# Altium PCB BRD220522_2022-07-04.pcbdoc
Units mm, origin at the board's own origin, x right, y up, seen from the top; angles counter-clockwise.
Board outline 129.01 x 102.76 mm, 2 copper layers (Top Layer, Bottom Layer); 67 components, 48 nets, 235 pads, 151 vias.
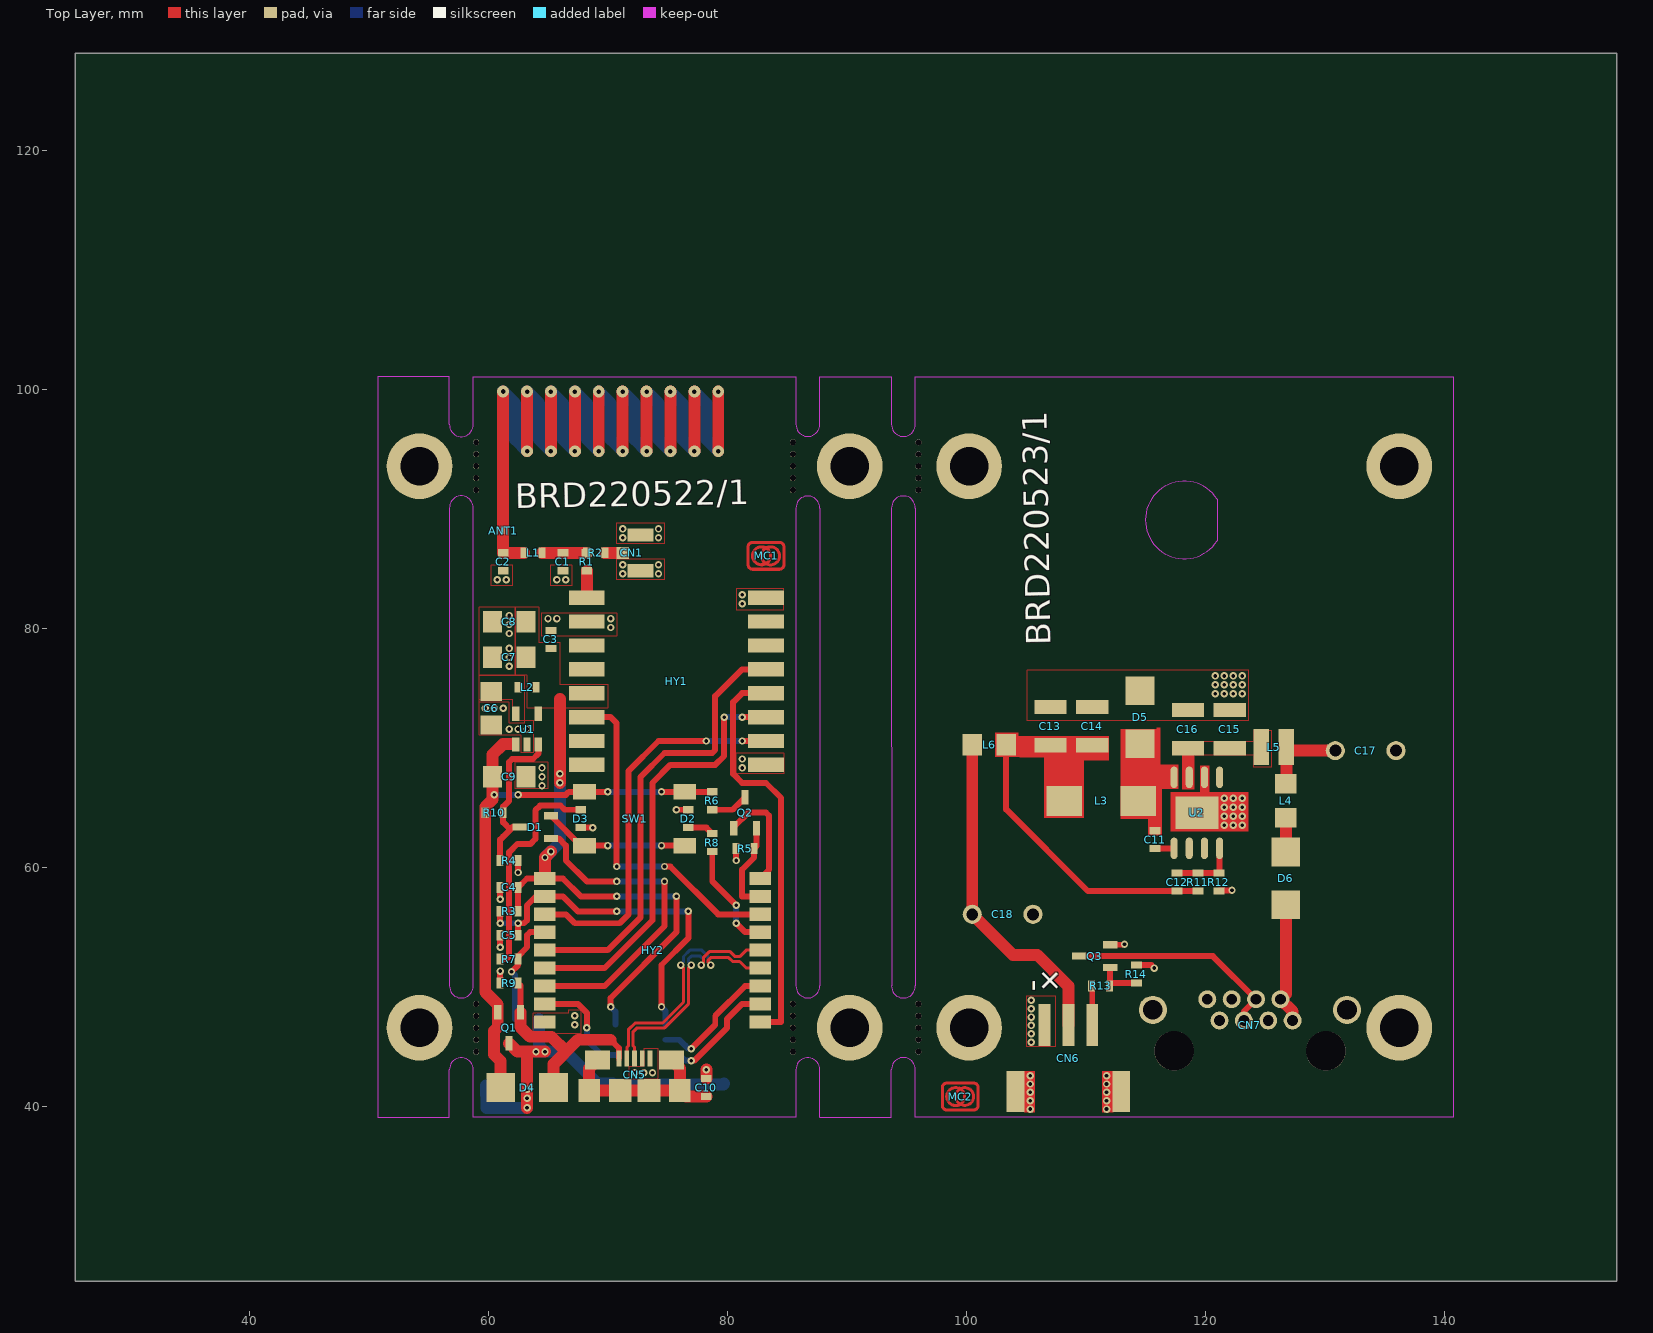
[diagram p0: Top Layer view]
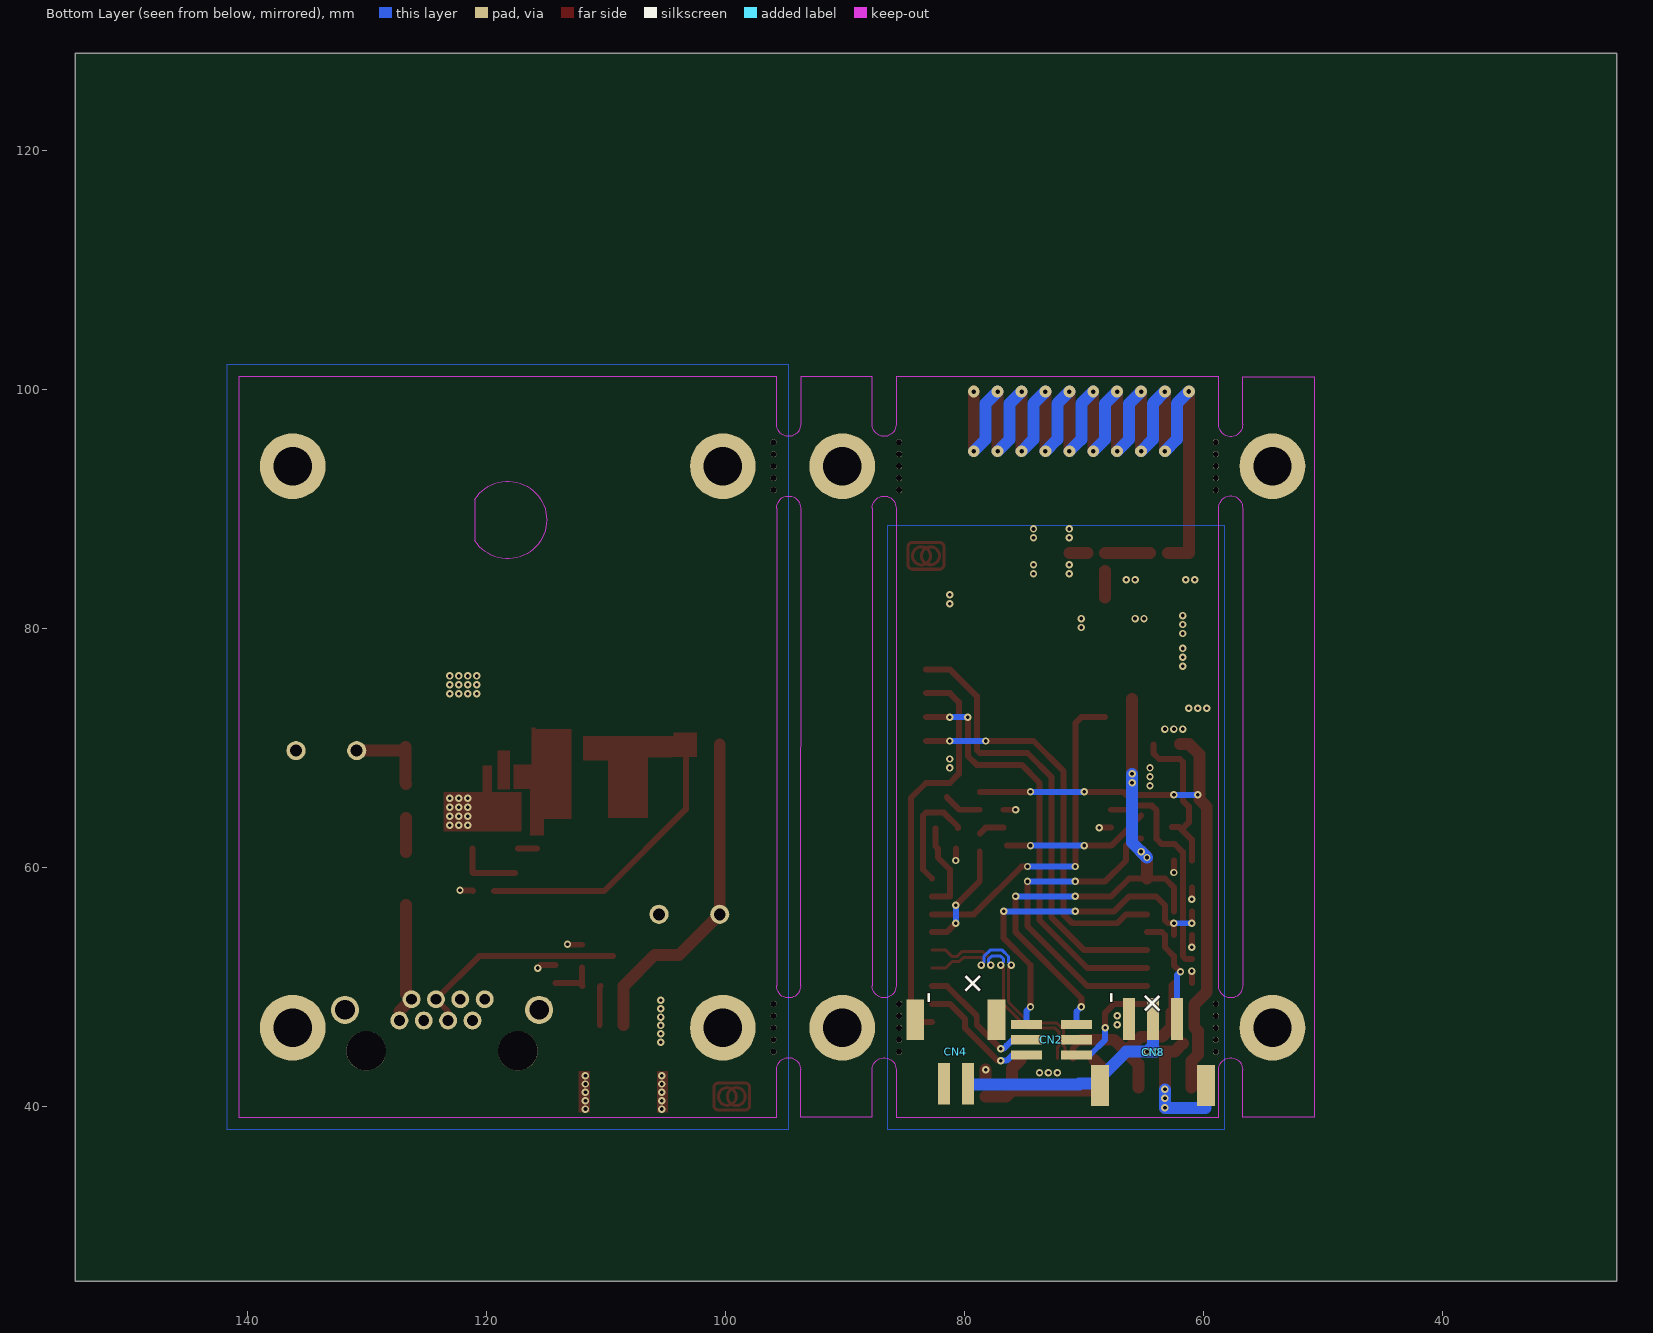
[diagram p1: Bottom Layer view, seen from below]

## Layer stack, top to bottom
Top Layer: signal copper (thickness not stored)
Dielectric: dielectric 0.32, FR-4, Dk 4.8
Bottom Layer: signal copper (thickness not stored)

## Board outline
154.414,25.4 25.4,25.4 25.4,128.164 154.414,128.164

## Components (designator, comment, footprint, x,y, rotation, side; value= is the part's Value field where it differs from the comment)
ANT1 "DN038" ANT_DN038 70.214,94.6 r0 top
C1 "100p" CA_0603 66.214,85.6 r270 top
C2 "100p" CA_0603 61.214,85.6 r270 top
C3 "100n" CA_0603 65.214,79.1 r90 top
C4 "100n" CA_0603 61.714,58.35 r180 top
C5 "100n" CA_0603 61.714,54.35 r180 top
C6 "10U/6V3" CA_1206 60.214,73.35 r270 top
C7 "10U/6V3" CA_1206 61.714,77.6 r180 top
C8 "10U/6V3" CA_1206 61.714,80.6 r180 top
C9 "10U/6V3" CA_1206 61.714,67.6 r0 top
C10 "1n" CA_0603 78.214,41.6 r270 top
C11 "10n" CA_0603 115.769,62.345 r90 top
C12 "82p" CA_0603 117.614,58.8 r90 top
C13 "22uF" CA_1210 107.019,71.845 r90 top
C14 "22uF" CA_1210 110.519,71.845 r90 top
C15 "10U/50V" CA_1210 122.019,71.595 r90 top
C16 "10U/50V" CA_1210 118.519,71.595 r90 top
C17 "100uF" CA_TH_D10_P05_H11 133.394,69.799 r0 top
C18 "100uF" CA_TH_D10_P05_H11 103.014,56.1 r0 top
CN1 "U.FL" CN_ANT-SMD_UFL-R-SMT-1 71.964,86.351 r90 top
CN2 "20021521" CN_HDR_2X3_180D_P127_SMD 72.714,45.6 r0 bottom
CN4 "S2B-PH" CN_HDR_1X2_90D_P20_JST_S2B-PH-SM4-TB 80.714,44.6 r180 bottom
CN5 "10118192-0002LF" CN_USB_MICRO_B_AMPHENOL_10118192-0002LF 72.214,41.35 r0 top
CN6 "S3B-PH" CN_HDR_1X3_90D_P25_JST_PH_S3B#1 108.514,44.1 r0 top
CN7 "X12ADGWA3DY1027" CN_MODJACK_8C8P_RA_NO_LED 123.714,48.1 r0 top
CN8 "S3B-PH" CN_HDR_1X3_90D_P25_JST_PH_S3B#2 64.214,44.6 r0 bottom
D1 "BAT54C" SC_SOT23-3 63.914,63.4 r90 top
D2 "GREEN" DI_LED_GREEN_0603 76.714,64.1 r270 top
D3 "RED" DI_LED_RED_0603 67.714,64.1 r90 top
D4 "MBRS240LT3G" DI_DO214AA_SMB 63.214,41.6 r0 top
D5 "MBRS240" DI_DO214AA_SMB 114.519,72.595 r90 top
D6 "MBRS240" DI_DO214AA_SMB 126.714,59.1 r270 top
HY1 "RFM69HCW-868S2" HY_RFM69HCW 75.714,75.601 r180 top
HY2 "ESP-C3-13U-4M" HY_WIRELM-SMD_ESP-C3-13U-2M 73.714,53.1 r0 top
L1 "L_unknown" CL_0603 63.714,86.35 r180 top
L2 "L_unknown" CL_0603 63.214,75.1 r0 top
L3 "10U" CL_STD6050 111.269,65.596 r180 top
L4 "120E/100MHz" CL_1206 126.714,65.6 r90 top
L5 "1uH" CL_1212 125.714,70.1 r180 top
L6 "120E/100MHz" CL_1206 101.894,70.299 r180 top
MC1 "LIEBTRAU_LOGO" MC_LIEBTRAU_LOGO 83.214,86.1 r180 top
MC2 "LIEBTRAU_LOGO" MC_LIEBTRAU_LOGO 99.464,40.85 r0 top
Q1 "SI3401A" SC_SOT23-3 61.714,46.6 r180 top
Q2 "NXV55UNR" SC_SOT23-3 81.464,64.6 r0 top
Q3 "BC847B" SC_SOT23-3 110.714,52.6 r90 top
R1 "0E" RE_0603 68.214,85.6 r90 top
R2 "0E" RE_0603 68.964,86.35 r0 top
R3 "10K" RE_0603 61.714,56.35 r0 top
R4 "2M2" RE_0603 61.714,60.6 r180 top
R5 "3K3" RE_0603 81.464,61.6 r0 top
R6 "10K" RE_0603 78.714,65.6 r270 top
R7 "10K" RE_0603 61.714,52.35 r0 top
R8 "10K" RE_0603 78.714,62.1 r270 top
R9 "2M2" RE_0603 61.714,50.35 r0 top
R10 "0E" RE_0603 60.464,64.6 r0 top
R11 "68K" RE_0603 119.364,58.8 r270 top
R12 "22K" RE_0603 121.114,58.8 r90 top
R13 "3K3" RE_0603 111.214,50.1 r180 top
R14 "22K" RE_0603 114.214,51.1 r90 top
SW1 "PTS645" SW_MOM_6X6 72.215,64.1 r0 top
U1 "RT9080-33GJ5" SC_SOT23-5 63.214,71.6 r90 top
U2 "RT8279GSP" SC_SO08_150MIL_BODY_PP 119.269,64.596 r90 top
? "" ? 95.714,108.506 r0 top
? "" ? 44.308,70.1 r0 top
? "" ? 72.214,101.049 r0 top
? "" ? 50.597,70.1 r0 top
? "" ? 118.214,101.067 r0 top

## Footprints (in the part's own frame and the unit in brackets; to place one, negate y for a bottom-side part, rotate by r counter-clockwise, add the part's x,y. Pads: shape width x height; smd on the part's side, far side on the other; paste and mask are expansions set on the pad)
ANT_DN038 [mil]
  rect 10x20 smd: 1(-354.42,-252.03)
  Top Layer lines w39.37: -275.58,9.84 -275.57,206.68 ; -196.85,9.84 -196.85,206.64 ; -118.15,9.84 -118.15,206.64 ; -39.36,9.84 -39.36,206.67 ; 39.38,9.83 39.38,206.68 ; 118.12,9.84 118.12,206.68 ; 196.85,9.84 196.86,206.67 ; 275.55,9.84 275.65,206.64 ; 354.33,9.84 354.34,206.68
  Bottom Layer lines w39.37: -354.33,206.69 -314.96,167.32 -314.96,49.21 -275.59,9.84 ; -275.57,206.68 -236.2,167.31 -236.2,49.2 -196.84,9.83 ; -196.84,206.68 -157.47,167.31 -157.47,49.2 -118.1,9.83 ; -118.11,206.68 -78.74,167.31 -78.74,49.2 -39.37,9.83 ; -39.36,206.68 0.01,167.31 0.01,49.2 39.38,9.83 ; 39.38,206.68 78.75,167.31 78.75,49.2 118.12,9.83 ; 118.12,206.68 157.49,167.31 157.49,49.2 196.86,9.83 ; 196.85,206.68 236.23,167.31 236.23,49.2 275.59,9.84 ; 275.6,206.67 314.97,167.3 314.97,49.19 354.34,9.82
CA_0603 [mm]
  rect 0.6x0.9 smd: 1(-0.75,0) 2(0.75,0)
CA_1206 [mil]
  rect 63x70.9 smd: 1(-55,0) 2(55,0)
CA_1210 [mm]
  rect 1.2x2.7 smd: 1(-1.6,0) 2(1.6,0)
CA_TH_D10_P05_H11 [mm]
  round 1.6 hole 1: 1(-2.54,0) 2(2.54,0)
CL_0603 [mm]
  rect 0.6x0.9 smd: 1(-0.75,0) 2(0.75,0)
CL_1206 [mil]
  rect 63x71 smd: 1(-56,0) 2(56,0)
CL_1212 [mm]
  rect 1.3x3 smd: 1(-1.05,0) 2(1.05,0)
CL_STD6050 [mm]
  rect 3x2.5 smd: 1(-3.1,0) 2(3.1,0)
CN_ANT-SMD_UFL-R-SMT-1 [mm]
  rect 1x1.05 smd: 1(0,0.75)
  rect 1.1x2.2 smd: 2(-1.5,-0.75) 2(1.5,-0.75)
CN_HDR_1X2_90D_P20_JST_S2B-PH-SM4-TB [mm]
  rect 1.5x3.4 smd: 0(-3.4,2.675) 0(3.4,2.675)
  rect 1x3.5 smd: 1(1,-2.675) 2(-1,-2.675)
CN_HDR_1X3_90D_P25_JST_PH_S3B#1 [mm]
  rect 1.5x3.4 smd: 0(-4.425,-2.825) 0(4.425,-2.825)
  rect 1x3.5 smd: 1(-2,2.725) 2(0,2.725) 3(2,2.725)
CN_HDR_1X3_90D_P25_JST_PH_S3B#2 [mm]
  rect 1.5x3.4 smd: 0(-4.425,2.825) 0(4.425,2.825)
  rect 1x3.5 smd: 1(2,-2.725) 2(0,-2.725) 3(-2,-2.725)
CN_HDR_2X3_180D_P127_SMD [mm]
  rect 2.6x0.76 smd: 1(2.1,-1.27) 2(-2.1,-1.27) 3(2.1,0) 4(-2.1,0) 5(2.1,1.27) 6(-2.1,1.27)
CN_MODJACK_8C8P_RA_NO_LED [mm]
  round 1.5 hole 0.9: 1(3.57,-0.89) 2(2.55,0.89) 3(1.53,-0.89) 4(0.51,0.89) 5(-0.51,-0.89) 6(-1.53,0.89) 7(-2.55,-0.89) 8(-3.57,0.89)
  round 2.35 hole 1.65: S(-8.125,0) S(8.125,0)
  round 3.3 hole 3.3 unplated: ""(-6.35,-3.43) ""(6.35,-3.43)
CN_USB_MICRO_B_AMPHENOL_10118192-0002LF [mm]
  rect 0.4x1.35 smd: 1(-1.3,2.68) 2(-0.65,2.68) 3(0.002,2.679) 4(0.65,2.68) 5(1.3,2.68)
  rect 1.8x1.9 smd: S(-3.8,0) S(3.8,0)
  rect 2.1x1.6 smd: S(-3.1,2.55) S(3.1,2.55)
  rect 1.9x1.9 smd: S(-1.2,0) S(1.2,0)
DI_DO214AA_SMB [mil]
  rect 94.5x94.5 smd: A(87,0) C(-87,0)
DI_LED_GREEN_0603 [mm]
  rect 0.6x0.9 smd: 1(-0.75,0) 2(0.75,0)
DI_LED_RED_0603 [mm]
  rect 0.6x0.9 smd: 1(-0.75,0) 2(0.75,0)
HY_RFM69HCW [mm]
  rect 3x1.2 smd: 1(-7.5,7) 2(-7.5,5) 3(-7.5,3) 4(-7.5,1) 5(-7.5,-1) 6(-7.5,-3) 7(-7.5,-5) 8(-7.5,-7) 9(7.5,-7) 10(7.5,-5) 11(7.5,-3) 12(7.5,-1) 13(7.5,1) 14(7.5,3) 15(7.5,5) 16(7.5,7)
HY_WIRELM-SMD_ESP-C3-13U-2M [mm]
  rect 1.8x1.1 smd: 1(-9,6) 2(-9,4.5) 3(-9,3) 4(-9,1.5) 5(-9,0) 6(-9,-1.5) 7(-9,-3) 8(-9,-4.5) 9(-9,-6) 10(9,-6) 11(9,-4.5) 12(9,-3) 13(9,-1.5) 14(9,0) 15(9,1.5) 16(9,3) 17(9,4.5) 18(9,6)
MC_LIEBTRAU_LOGO [mm]
  Top Layer lines w0.254: 1.5,0.75 ccw(c1.127,0.751) 1.125,1.125 -1.125,1.125 ccw(c-1.125,0.75) -1.5,0.75 -1.5,-0.75 ccw(c-1.125,-0.75) -1.125,-1.125 1.125,-1.125 ccw(c1.125,-0.75) 1.5,-0.75 1.5,0.75 ; 1.125,0 ccw(c0.375,0) -0.375,0 ccw(c0.375,0) 1.125,0 ; 0.375,0 ccw(c-0.375,0.004) -1.125,0 ccw(c-0.375,-0.004) 0.375,0
RE_0603 [mm]
  rect 0.6x0.9 smd: 1(-0.75,0) 2(0.75,0)
SC_SO08_150MIL_BODY_PP [mm]
  rect 2.7x3.6 smd: 0(0,0)
  oval 1.8x0.6 smd: 1(-2.972,1.905) 2(-2.972,0.635) 3(-2.972,-0.635) 4(-2.972,-1.905) 5(2.972,-1.905) 6(2.972,-0.635) 7(2.972,0.635) 8(2.972,1.905)
SC_SOT23-3 [mm]
  rect 0.6x1.2 smd: 1(-0.95,-1.3) 2(0.95,-1.3) 3(0,1.3)
SC_SOT23-5 [mil]
  rect 47.2x23.6 smd: 1(-51,37) 2(-51,0) 3(-51,-37) 4(51,-37) 5(51,37)
SW_MOM_6X6 [mm]
  rect 1.9x1.3 smd: 1(-4.2,2.25) 2(4.2,2.25) 3(-4.2,-2.25) 4(4.2,-2.25)
? [mm]

## Free pads (board coordinates)
  round 5.5 hole 3.2: 1(54.214,46.6) 1(54.214,93.6) 1(90.214,46.6) 1(90.214,93.6) 1(100.214,93.6) 1(100.214,46.6) 1(136.214,93.6) 1(136.214,46.6)
  round 0.5 hole 0.5 unplated: ""(58.963,91.6) ""(58.963,92.6) ""(58.963,93.6) ""(58.963,94.6) ""(58.963,95.6) ""(58.964,44.601) ""(58.964,45.601) ""(58.964,46.601) ""(58.964,47.601) ""(58.964,48.601) ""(85.464,44.602) ""(85.464,45.602) ""(85.464,46.602) ""(85.464,47.602) ""(85.464,48.602) ""(85.464,91.6) ""(85.464,92.6) ""(85.464,93.6) ""(85.464,94.6) ""(85.464,95.6) ""(95.964,44.6) ""(95.964,45.6) ""(95.964,46.6) ""(95.964,47.6) ""(95.964,48.6) ""(95.964,91.6) ""(95.964,92.6) ""(95.964,93.6) ""(95.964,94.6) ""(95.964,95.6)

## Via types
v1: diameter 0.62, hole 0.31, Top Layer to Bottom Layer, tented both sides, 132 vias
v2: diameter 1, hole 0.38, Top Layer to Bottom Layer, tented both sides, 19 vias

## Nets (pads, with @x,y where several pads share a name; then routed paths per layer and width w, separated by ;. In a path a pad name is that pad's centre, name@x,y a point inside that pad or via, vN(x,y) a via of type N, cw(c..) or ccw(c..) an arc to the next point about the centre after c; other vN are vias at no path point)
+3V3: C3.1 C4.1 C7.1 C8.1 CN2.2 HY1.13 HY2.1 L2.2 R3.2 | length 46.3
  Top Layer w0.5: R3.2 C4.1 63.215,59.1 HY2.1 66.214,59.1 67.715,57.6 v1(70.714,57.6) ; v1(70.214,48.35) 70.214,49.1 75.715,54.6 v1(75.714,57.6)
  Top Layer w1: HY2.1 v1(64.714,60.85) v1(65.215,61.35) ; v1(65.964,67.1) v1(65.964,67.85) 65.964,74.1
  Bottom Layer w0.5: v1(70.214,48.35) 70.614,47.95 CN2.2 ; v1(70.714,57.6) v1(75.714,57.6)
  Bottom Layer w1: v1(64.714,60.85) 65.964,62.1 v1(65.964,67.85)
+5V: C18.1 CN6.2 L6.2 | length 28
  Top Layer w1: L6.2 100.472,56.102 C18.1 103.874,52.7 105.914,52.7 108.514,50.1 CN6.2
/CS: HY1.5 HY2.5 | length 37.8
  Top Layer w0.5: HY2.5@64.714,53.099 69.964,53.099 72.715,55.85 72.715,67.6 74.714,69.599 78.714,69.599 78.963,69.848 78.963,74.351 81.216,76.602 HY1.5@83.215,76.602
ADC: HY2.17 Q2.2 R5.2 | length 7.7
  Top Layer w0.5: Q2.2 82.414,61.8 R5.2 82.215,60.85 81.214,59.85 81.214,57.6 HY2.17
ANT1_1: ANT1.1 C2.1 L1.2 | length 15.2
  Top Layer w1: 61.214,99.85 C2.1 L1.2
C1_1: C1.1 L1.1 R1.2 R2.1 | length 3.8
  Top Layer w1: L1.1 R1.2
C11_1: C11.1 U2.1 | length 1.6
  Top Layer w0.5: C11.1 115.769,61.624 U2.1
C15_1: C15.1 C16.1 L5.2 U2.7
CN5_S: C10.2 CN5.S | length 15.7
  Top Layer w1: CN5.S@69.115,43.9 68.414,43.2 68.414,41.35 CN5.S@76.014,41.35 ; CN5.S@75.314,43.9 76.014,43.2 CN5.S@76.014,41.35 ; C10.2 76.514,40.85 CN5.S@76.014,41.35
CN7_1: CN7.1 CN7.2 D6.A | length 10.3
  Top Layer w1: D6.A 126.714,49.44 CN7.2 127.284,47.97 CN7.1
CN7_4: CN7.4 CN7.5 Q3.3 | length 18.5
  Top Layer w0.5: Q3.3 120.614,52.601 CN7.4 ; CN7.5 123.204,47.97 CN7.4
D1_2: D1.2 SW1.3 SW1.4 | length 12.2
  Top Layer w0.5: D1.2 65.215,64.348 67.714,61.849 SW1.3 ; SW1.3 v1(69.964,61.85) ; v1(74.465,61.85) SW1.4
  Bottom Layer w0.5: v1(69.964,61.85) v1(74.465,61.85)
D1_3: D1.3 R4.2 R10.2 U1.3 | length 13.4
  Top Layer w0.5: R4.2 60.964,62.35 61.214,62.6 62.014,63.4 D1.3 ; 61.814,63.2 61.215,63.799 R10.2 61.215,65.101 61.714,65.601 61.714,68.849 61.966,69.101 63.716,69.101 64.155,69.54 U1.3
D2_2: D2.2 R8.1 | length 2.2
  Top Layer w0.5: D2.2 78.215,63.35 R8.1
D3_2: D3.2 R7.1 | length 18.7
  Top Layer w0.5: R7.1 61.465,52.35 61.714,52.601 61.714,61.301 62.413,61.999 63.515,61.999 63.914,62.4 63.914,64.801 64.315,65.2 66.014,65.2 66.365,64.849 D3.2@67.714,64.849
FB: C12.2 R11.1 R12.2 U2.4 | length 5.6
  Top Layer w0.5: C12.2 R12.2 121.174,59.609 U2.4
GND: C1.2 C2.2 C3.2 C4.2 C5.2 C6.2 C7.2 C8.2 C9.2 C10.1 C13.2 C14.2 C15.2 C16.2 C17.2 C18.2 CN1.2 CN2.4 CN4.0 CN4.2 CN5.5 CN6.0 CN6.1 CN7.3 CN7.6 CN7.S CN8.1 D2.1 D3.1 D5.A HY1.1 HY1.8 HY1.10 HY2.9 pad.1 Q3.2 R4.1 R5.1 R9.1 R12.1 R14.2 U1.2 U2.0 U2.6 | length 11.7
  Top Layer w0.5: v1(60.964,53.35) C5.2 ; v1(60.964,57.35) C4.2 ; R9.1 v1(60.965,51.35) ; v1@62.465,59.6 R4.1 ; D3.1 v1(68.714,63.35) ; v1(75.714,64.85) D2.1 ; v1(80.714,60.6) R5.1 ; Q3.2 113.164,53.55 v1(113.215,53.6) ; R14.2 115.464,51.85 v1(115.714,51.6) ; R12.1 121.165,58.1 v1(122.214,58.1)
  Top Layer w1: C10.1 v1(78.215,43.1)
  other v1: 105.314,39.8 111.714,39.8 105.314,40.5 111.714,40.5 105.314,41.2 111.714,41.2 105.314,41.9 111.714,41.9 105.314,42.6 111.714,42.6 72.215,42.85 72.964,42.85 73.714,42.85 105.414,45.4 105.414,46.1 105.414,46.8 67.215,46.85 105.414,47.5 67.215,47.6 105.414,48.2 105.414,48.9 62.465,59.6 121.565,63.55 122.315,63.55 123.065,63.55 121.565,64.3 122.315,64.3 123.065,64.3 121.565,65.05 122.315,65.05 123.065,65.05 121.565,65.8 122.315,65.8 123.065,65.8 64.465,66.85 64.465,67.6 64.465,68.35 81.215,68.35 81.215,69.1 61.714,71.6 62.465,71.6 63.215,71.6 59.714,73.35 60.465,73.35 61.214,73.35 120.814,74.55 121.565,74.55 122.315,74.55 123.065,74.55 120.814,75.3 121.565,75.3 122.315,75.3 123.065,75.3 120.814,76.05 121.565,76.05 122.315,76.05 123.065,76.05 61.714,76.85 61.714,77.6 61.714,78.35 61.714,79.6 70.214,80.1 61.714,80.35 64.964,80.85 65.714,80.85 70.214,80.85 61.714,81.1 81.215,82.1 81.215,82.85 60.714,84.1 61.465,84.1 65.714,84.1 66.465,84.1 71.214,84.6 74.215,84.6 71.214,85.35 74.215,85.35 71.214,87.6 74.215,87.6 71.214,88.35 74.215,88.35
HY1_9: HY1.9 R1.1 | length 2.2
  Top Layer w1: HY1.9 R1.1
HY1_14: HY1.14 HY2.16 | length 28.4
  Top Layer w0.5: HY1.14 70.214,72.601 70.714,72.1 v1(70.714,60.1) ; v1(74.714,60.1) 75.214,60.1 79.214,56.1 HY2.16
  Bottom Layer w0.5: v1(70.714,60.1) v1(74.714,60.1)
HY2_2: C5.1 CN2.1 HY2.2 R3.1 | length 30.5
  Top Layer w0.5: v1(60.964,55.35) R3.1 ; C5.1 v1(62.465,55.35) 62.965,55.35 63.214,55.6 63.214,56.85 63.964,57.6 HY2.2 66.215,57.6 66.964,56.85 67.464,56.35 v1(70.714,56.35) ; v1(74.465,48.35) 74.465,51.852 76.715,54.1 v1(76.714,56.35)
  Bottom Layer w0.5: v1(60.964,55.35) v1(62.465,55.35) ; v1(70.714,56.35) v1(76.714,56.35) ; v1(74.465,48.35) 74.815,48 CN2.1
HY2_4: CN8.3 HY2.4 R7.2 | length 9.3
  Top Layer w0.5: v1(61.914,51.3) 62.465,51.85 R7.2 62.464,52.6 63.214,53.35 63.214,53.6 ; 63.215,53.599 63.215,54.351 63.464,54.6 HY2.4
  Bottom Layer w0.5: v1(61.914,51.3) 62.215,51 CN8.3
HY2_7: D1.1 HY2.7 | length 27.5
  Top Layer w0.5: HY2.7 69.715,50.099 74.714,55.1 v1(74.714,58.85) ; D1.1 65.863,62.45 66.464,61.849 66.464,60.6 68.214,58.85 v1(70.714,58.85)
  Bottom Layer w0.5: v1(70.714,58.85) v1(74.714,58.85)
HY2_8: CN2.6 HY2.8 | length 9
  Top Layer w0.5: HY2.8 67.465,48.6 68.215,47.85 v1(68.215,46.6)
  Bottom Layer w0.5: v1(68.215,46.6) 68.215,45.6 69.485,44.33 CN2.6
HY2_11: CN2.5 HY2.11 | length 10.5
  Top Layer w0.5: v1(76.964,43.85) 77.213,43.851 79.964,46.599 79.964,47.351 81.214,48.601 HY2.11
  Bottom Layer w0.5: CN2.5 75.985,44.33 76.464,43.85 v1(76.964,43.85)
HY2_12: CN2.3 HY2.12 | length 10.8
  Top Layer w0.5: v1@76.964,44.85 78.964,46.85 78.964,47.6 81.464,50.1 HY2.12
  Bottom Layer w0.5: CN2.3 75.965,45.6 76.464,45.1 76.714,44.85 v1@76.964,44.85
  other v1: 76.964,44.85
HY2_15: HY2.15 R8.2 | length 9.1
  Top Layer w0.5: R8.2 78.714,58.85 v1(80.714,56.85) ; v1(80.714,55.35) 81.465,54.6 HY2.15
  Bottom Layer w0.5: v1(80.714,55.35) v1(80.714,56.85)
HY2_18: HY2.18 Q2.1 | length 9.2
  Top Layer w0.5: Q2.1 80.515,63.4 81.714,64.6 83.214,64.6 83.464,64.35 83.464,59.85 HY2.18
L2_1: C6.1 L2.1 U1.5
L3_2: C12.1 C13.1 C14.1 L3.2 L6.1 R11.2 | length 24.3
  Top Layer w0.5: L6.1 103.316,64.877 110.143,58.05 C12.1 ; C12.1 R11.2
L4_1: D6.C L4.1 | length 2.9
  Top Layer w1: D6.C L4.1
L4_2: C17.1 L4.2 L5.1 | length 7.3
  Top Layer w1: L4.2 126.765,67.073 L5.1 127.066,69.799 C17.1
MISO: HY1.2 HY2.3 | length 32.2
  Top Layer w0.5: HY2.3 66.464,56.1 ; 66.464,56.099 67.213,55.349 70.965,55.349 71.714,56.099 71.714,68.1 74.214,70.6 v1(78.215,70.6) ; v1(81.215,70.601) HY1.2
  Bottom Layer w0.5: v1(78.215,70.6) 81.213,70.6 v1(81.215,70.601)
MOSI: HY1.3 HY2.6 | length 35.8
  Top Layer w0.5: HY2.6 69.715,51.6 73.716,55.601 73.716,67.099 75.214,68.601 78.965,68.601 ; 78.966,68.601 79.715,69.35 v1(79.714,72.6) ; v1(81.215,72.6) HY1.3@83.215,72.601
  Bottom Layer w0.5: v1(79.714,72.6) v1(81.215,72.6)
NULL: 
Q3_1: Q3.1 R13.1 R14.1 | length 3.9
  Top Layer w0.5: Q3.1 112.014,50.15 R13.1 112.214,50.35 R14.1
R2_2: CN1.1 R2.2 | length 1.5
  Top Layer w1: R2.2 CN1.1
R6_2: Q2.3 R6.2 | length 3.2
  Top Layer w0.5: R6.2@78.714,64.85 80.415,64.85 Q2.3
R13_2: CN6.3 R13.2 | length 3.3
  Top Layer w0.5: R13.2 110.514,50.05 CN6.3
S$33489: 
S$94106: 
S$94396: 
SCK: HY1.4 HY2.10 | length 34.4
  Top Layer w0.5: HY2.10 84.464,47.1 84.464,65.84 83.215,67.089 81.214,67.089 80.464,67.849 80.464,73.851 81.216,74.6 HY1.4@83.215,74.6
SW: C11.2 D5.C L3.1 U2.8
USB_D+: CN5.3 HY2.14 | length 19.9
  Top Layer w0.254: CN5.3 72.218,44.958 72.096,45.081 72.097,46.097 72.097,46.271 72.427,46.6 74.214,46.6 74.736,46.6 76.715,48.578 76.715,51.6 v1(76.964,51.85) ; v1(77.787,51.85) 77.965,52.027 77.965,52.474 78.466,52.974 80.216,52.974 80.637,52.553 81.013,52.553 81.559,53.099 HY2.14@82.715,53.099
  Bottom Layer w0.254: v1(76.964,51.85) 76.715,52.1 76.715,52.35 76.964,52.6 77.715,52.6 77.964,52.35 77.964,52.028 v1(77.787,51.85)
USB_D-: CN5.2 HY2.13 | length 20.6
  Top Layer w0.254: CN5.2 71.566,44.959 71.69,45.082 71.692,46.098 71.692,46.439 72.258,47.006 74.214,47.006 74.568,47.006 76.308,48.746 76.308,51.631 v1(76.089,51.85) ; v1(78.589,51.85) 78.372,52.068 78.372,52.257 78.589,52.475 80.089,52.475 80.418,52.146 81.013,52.146 81.559,51.6 HY2.13
  Bottom Layer w0.254: v1(76.089,51.85) 76.308,52.069 76.308,52.569 76.84,53.1 77.839,53.1 78.37,52.569 78.37,52.069 v1(78.589,51.85)
VBAT: CN4.1 CN8.0 CN8.2 Q1.3 | length 36.2
  Top Layer w1: Q1.3 62.414,44.6 v1(64.714,44.6) ; 63.128,44.6 63.214,44.513 v1(63.215,41.456) v1(63.215,40.694) v1(63.215,39.9)
  Bottom Layer w0.5: v1(63.215,39.9) v1(63.215,41.456)
  Bottom Layer w1: CN8.0@59.789,41.776 59.814,39.901 v1(63.215,39.9) ; v1(63.215,39.9) v1(63.215,41.456) ; v1(63.964,44.6) v1(64.714,44.6) ; CN8.2 64.214,45.1 v1(64.714,44.6) ; 70.388,41.85 79.639,41.85 CN4.1 ; 70.388,41.925 69.139,41.925 66.464,44.6 v1(64.714,44.6)
VCC: C9.1 D4.C Q1.2 R6.1 R10.1 SW1.1 SW1.2 U1.1 | length 49.7
  Top Layer w0.5: 60.317,65.702 60.465,65.85 v1(60.465,66.1) ; v1(62.465,66.1) 66.464,66.101 66.715,66.35 SW1.1 ; SW1.1 v1(69.964,66.35) ; v1(74.465,66.35) SW1.2 R6.1
  Top Layer w1: Q1.2 60.764,48.55 59.715,49.599 59.715,65.1 60.317,65.702 C9.1 60.317,69.454 61.214,70.351 61.966,70.351 ; Q1.2 60.765,46.65 60.464,46.35 60.464,44.35 61.005,43.81 D4.C
  Bottom Layer w0.5: v1(60.465,66.1) v1(62.465,66.1) ; v1(69.964,66.35) v1(74.465,66.35)
VUSB: CN5.1 D4.A Q1.1 R9.2 | length 17.9
  Top Layer w0.5: R9.2 62.664,50.15 Q1.1 ; 70.214,45.6 70.914,44.9 CN5.1
  Top Layer w1: Q1.1 62.664,46.65 63.464,45.85 65.252,45.85 66.484,44.619 ; D4.A 65.425,43.559 67.213,45.349 67.464,45.6 70.214,45.6
pads on no net: CN5.4 CN7. CN7.7 CN7.8 HY1.6 HY1.7 HY1.11 HY1.12 HY1.15 HY1.16 U1.4 U2.2 U2.3 U2.5
copper on no net:
  other v2: 63.215,94.85 65.215,94.85 67.215,94.85 69.215,94.85 71.215,94.85 73.215,94.85 75.215,94.85 77.215,94.85 79.215,94.85 61.215,99.85 63.215,99.85 65.215,99.85 67.215,99.85 69.215,99.85 71.215,99.85 73.215,99.85 75.215,99.85 77.215,99.85 79.215,99.85

## Polygon pours and split planes (outlines as drawn)
GND on Bottom Layer (solid): 58.214,88.6 86.464,88.6 86.464,38.1 58.214,38.1
GND on Bottom Layer (solid): 94.714,102.1 141.714,102.1 141.714,38.1 94.714,38.1
GND on Top Layer (solid): 80.714,69.6 84.714,69.6 84.714,67.85 80.714,67.85
GND on Top Layer (solid): 80.714,83.35 80.714,81.6 84.714,81.6 84.714,83.35 80.714,83.35
GND on Top Layer (solid): 66.714,81.35 70.714,81.35 70.714,79.35 64.464,79.35 64.464,81.35
GND on Top Layer (solid): 71.714,42.35 74.214,42.35 74.214,44.85 72.964,44.85 72.964,43.35 71.714,43.35 71.714,42.35
GND on Top Layer (solid): 62.214,68.85 64.964,68.85 64.964,66.6 62.214,66.6 62.214,68.85
GND on Top Layer (solid): 59.214,74.1 61.964,74.1 61.964,72.35 63.714,72.35 63.714,69.6 62.714,69.6 62.714,71.1 59.214,71.1 59.214,73.6
L2_1 on Top Layer (solid): 59.214,76.1 62.964,76.1 62.964,72.1 61.714,72.1 61.714,73.85 59.214,73.85
+3V3 on Top Layer (solid): 62.214,81.85 64.214,81.85 64.214,78.85 65.964,78.85 65.964,75.35 69.964,75.35 69.964,73.35 63.214,73.35 63.214,76.1 62.214,76.1
GND on Top Layer (solid): 59.214,81.85 62.214,81.85 62.214,76.1 59.214,76.1
GND on Top Layer (solid): 60.214,85.35 61.964,85.35 61.964,83.6 60.214,83.6
GND on Top Layer (solid): 65.214,85.35 66.964,85.35 66.964,83.6 65.214,83.6
GND on Top Layer (solid): 70.714,85.85 74.714,85.85 74.714,84.1 70.714,84.1
GND on Top Layer (solid): 70.714,88.85 74.714,88.85 74.714,87.1 70.714,87.1
GND on Top Layer (solid): 63.714,47.85 66.714,47.85 66.714,48.1 67.714,48.1 67.714,46.1 63.714,46.1
GND on Top Layer (solid): 123.564,72.3 105.064,72.3 105.064,76.55 123.564,76.55 123.564,75.3 123.564,72.3
C15_1 on Top Layer (solid): 125.514,68.4 124.014,68.4 124.014,69.4 118.914,69.4 118.814,69.5 118.814,70.6 124.014,70.6 124.014,71.5 125.514,71.5
GND on Top Layer (solid): 105.014,49.3 107.414,49.3 107.414,45 105.014,45

## Keep-outs
Keep-Out Layer:
  lines w0.1: 120.965,87.368 cw(c118.214,89.1) 120.965,90.832
  lines w0.1 net S$33489: 56.715,90.096 cw(c57.715,90.117) 58.714,90.096 ; 56.715,97.1 ccw(c57.715,97.079) 58.714,97.1 ; 56.715,43.096 cw(c57.715,43.101) 58.715,43.096 ; 56.715,50.1 ccw(c57.715,50.095) 58.715,50.1 ; 85.714,43.098 cw(c86.714,43.098) 87.715,43.098 ; 85.714,50.102 ccw(c86.714,50.102) 87.715,50.102 ; 85.715,90.096 cw(c86.714,90.105) 87.714,90.096 ; 85.715,97.1 ccw(c86.714,97.091) 87.714,97.1 ; 93.714,43.1 cw(c94.714,43.11) 95.714,43.1 ; 93.714,50.104 ccw(c94.714,50.093) 95.714,50.104 ; 93.714,90.099 cw(c94.714,90.108) 95.714,90.099 ; 93.714,97.103 ccw(c94.714,97.094) 95.714,97.103

## Other copper
Top Layer:
  region net GND: 117.064,63.05 117.064,66.3 123.564,66.3 123.564,63.05
  region net C15_1: 118.064,66.55 118.064,69.8 119.064,69.8 119.064,66.55 118.064,66.55
  region net GND: 119.564,68.55 120.314,68.55 120.314,66.05 119.564,66.05 119.564,66.3 119.564,67.55
  region net SW: 115.914,71.6 115.914,71.7 116.214,71.7 116.214,68.6 117.714,68.6 117.714,66.6 116.314,66.6 116.314,62.7 115.214,62.7 115.214,64.1 112.914,64.1 112.914,71.6 115.914,71.6
  region net L3_2: 102.394,69.299 102.394,71.299 104.314,71.3 104.314,71 111.914,71 111.914,69 109.814,69 109.814,64.2 106.514,64.2 106.514,69.2
  rectangle net GND: 104.814,39.5 105.714,43
  rectangle net GND: 111.314,39.5 112.314,43

## Silkscreen, mask and mechanical layers (free items; w line width, h text height)
Top Overlay:
  text "BRD220522/1" at 62.232,90.084 h2.03 r1
  text "BRD220523/1" at 107.03,78.618 h2.03 r91
  text "+" at 108.433,50.318 h2.03 r135
  text "-" at 106.43,49.6 h2.03 r90
Bottom Overlay:
  text "-" at 68.481,49.6 h2.03 r90
  text "-" at 83.73,49.6 h2.03 r90
  text "+" at 65.683,48.881 h2.03 r45
  text "+" at 79.496,48.881 h2.03 r315
Bottom Solder:
  rectangle: 121.014,86 123.014,92.5
  circle w7 net S$94396: c118.214,89.1 r6.8
Document:
  circle w0.1: c118.214,89.1 r10.5
  text "Board / cutout" at 116.214,89.1 h1